# Altium PCB PCB2.PcbDoc
Units mil, origin at the board's own origin, x right, y up, seen from the top; angles counter-clockwise.
Board outline 5995 x 3035 mil, 2 copper layers (Top Layer, Bottom Layer); 109 components, 60 nets, 338 pads, 102 vias.
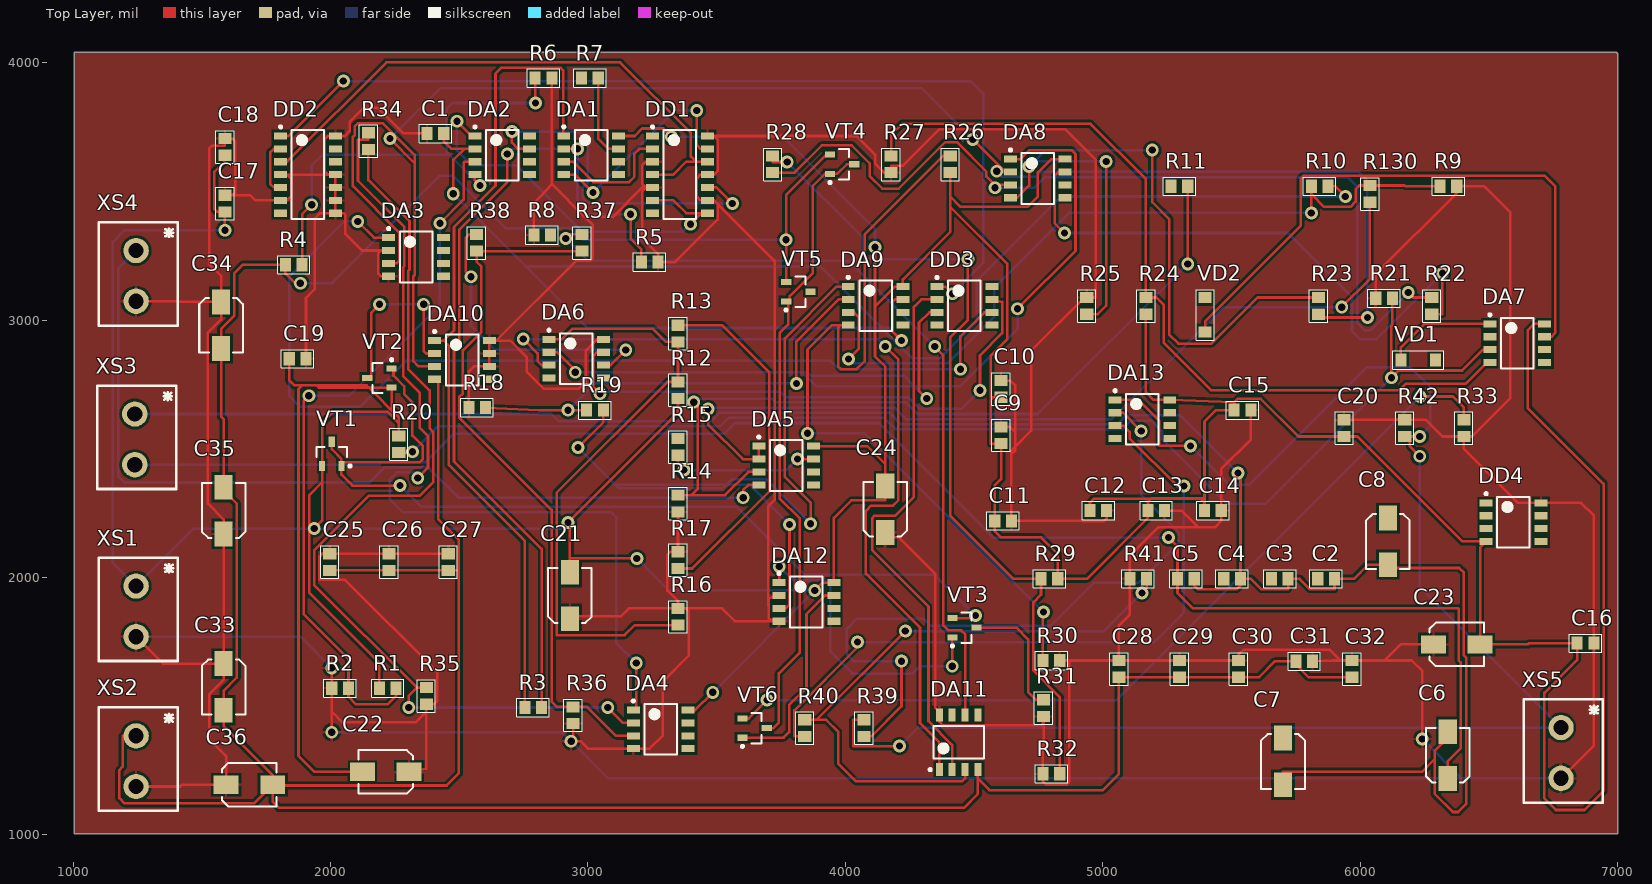
[diagram p0: Top Layer view]
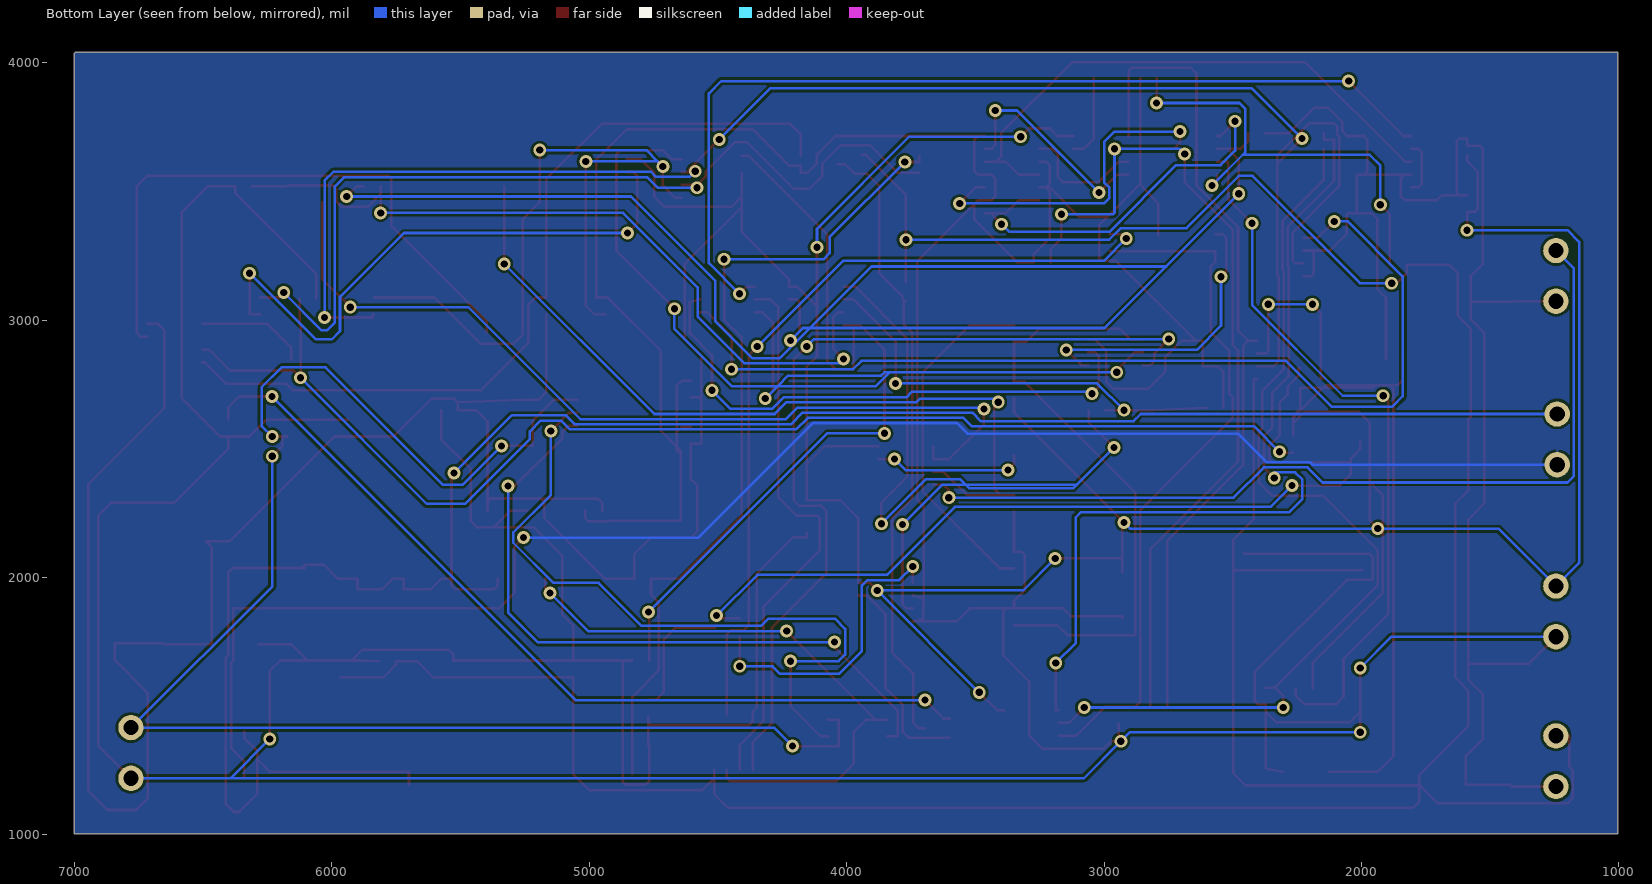
[diagram p1: Bottom Layer view, seen from below]
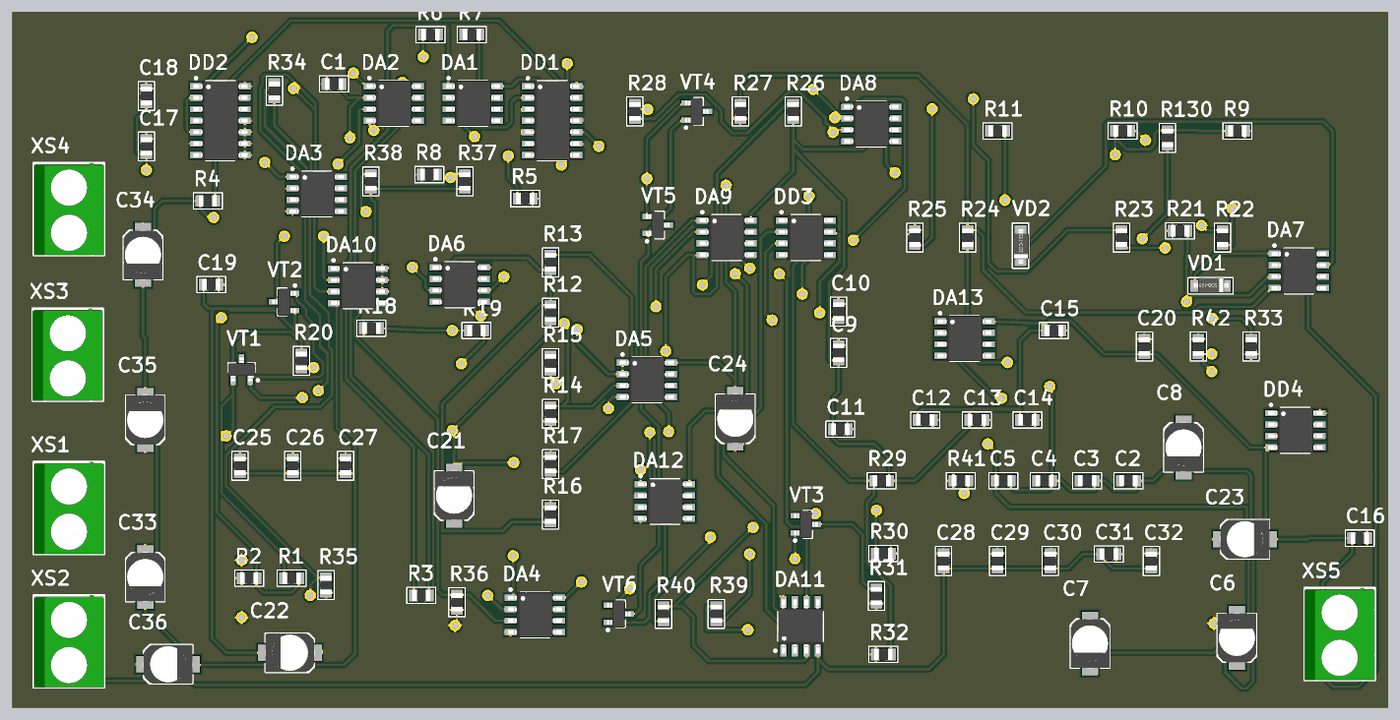
[diagram p2: 3D render of the assembled board from above, using the file's embedded part models]

## Layer stack, top to bottom
Top Solder: solder mask 0.4, Solder Resist, Dk 3.5
Top Layer: signal copper 1.4
Dielectric 1: dielectric 12.6, FR-4, Dk 4.8
Bottom Layer: signal copper 1.4
Bottom Solder: solder mask 0.4, Solder Resist, Dk 3.5

## Board outline
1005,1005 7000,1005 7000,4035 6995,4040 1005,4040

## Design rules (kind name [scope] priority, off if disabled: settings)
Clearance [All] p1: gap=10 ignorepadtopadclearanceinfootprint=FALSE except(0: Arc-Hole Track-Hole SMDPad-Hole THPad-Hole Via-Hole Fill-Hole Poly-Hole Region-Hole Text-Hole)
PolygonConnect [All] p1: connectstyle=Relief reliefconductorwidth=10 reliefentries=4 polygonreliefangle="90 Angle" airgapwidth=10
RoutingVias [All] p1: holewidth=28 width=50 viastyle="Through Hole" minholewidth=28 minwidth=50 maxholewidth=28 maxwidth=50
SolderMaskExpansion [All] p1: expansion=4 istentingtop=FALSE
Width [All] p1: maxlimit=10 minlimit=10 preferedwidth=10
30 further rules are at their usual default settings.

## Components (designator, comment, footprint, x,y, rotation, side; value= is the part's Value field where it differs from the comment)
C1 "39n" 0805 2407.5,3725 r0 top
C2 "39n" 0805 5867.5,1995 r180 top
C3 "39n" 0805 5687.5,1995 r180 top
C4 "39n" 0805 5502.5,1995 r180 top
C5 "39n" 0805 5322.5,1995 r180 top
C6 "1000" "ECAP SMD, 1 мкФ, 50В, Конденсатор электролитический алюминиевый SMD" 6340,1310 r90 top
C7 "1000" "ECAP SMD, 1 мкФ, 50В, Конденсатор электролитический алюминиевый SMD" 5700,1285.55 r270 top
C8 "1000" "ECAP SMD, 1 мкФ, 50В, Конденсатор электролитический алюминиевый SMD" 6107.5,2140 r270 top
C9 "39n" 0805 4605,2552.5 r90 top
C10 "39n" 0805 4605,2732.5 r90 top
C11 "39n" 0805 4612.52,2220 r0 top
C12 "39n" 0805 4982.5,2260 r0 top
C13 "39n" 0805 5207.5,2260 r0 top
C14 "39n" 0805 5427.5,2260 r0 top
C15 "39n" 0805 5542.52,2650 r0 top
C16 "39n" 0805 6875,1745 r0 top
C17 "39n" 0805 1590,3452.5 r90 top
C18 "39n" 0805 1590,3672.5 r90 top
C19 "39n" 0805 1872.52,2850 r0 top
C20 "39n" 0805 5937.5,2580 r90 top
C21 "1000" "ECAP SMD, 1 мкФ, 50В, Конденсатор электролитический алюминиевый SMD" 2930,1930 r90 top
C22 "1000" "ECAP SMD, 1 мкФ, 50В, Конденсатор электролитический алюминиевый SMD" 2215,1245 r180 top
C23 "1000" "ECAP SMD, 1 мкФ, 50В, Конденсатор электролитический алюминиевый SMD" 6375,1740 r0 top
C24 "1000" "ECAP SMD, 1 мкФ, 50В, Конденсатор электролитический алюминиевый SMD" 4155,2265 r90 top
C25 "39n" 0805 1997.5,2060 r90 top
C26 "39n" 0805 2227.5,2060 r90 top
C27 "39n" 0805 2457.5,2060 r90 top
C28 "39n" 0805 5062.5,1645 r90 top
C29 "39n" 0805 5297.5,1645 r90 top
C30 "39n" 0805 5527.5,1645 r90 top
C31 "39n" 0805 5782.5,1675 r0 top
C32 "39n" 0805 5967.5,1645 r90 top
C33 "1000" "ECAP SMD, 1 мкФ, 50В, Конденсатор электролитический алюминиевый SMD" 1585,1575 r270 top
C34 "1000" "ECAP SMD, 1 мкФ, 50В, Конденсатор электролитический алюминиевый SMD" 1575,2980 r270 top
C35 "1000" "ECAP SMD, 1 мкФ, 50В, Конденсатор электролитический алюминиевый SMD" 1585,2260 r90 top
C36 "1000" "ECAP SMD, 1 мкФ, 50В, Конденсатор электролитический алюминиевый SMD" 1685,1195 r0 top
DA1 "КФ140УД18" SOIC-8 3012.5,3640 r0 top
DA2 "КФ140УД18" SOIC-8 2667.5,3640 r0 top
DA3 "КФ140УД18" SOIC-8 2332.5,3245 r0 top
DA4 "КФ140УД18" SOIC-8 3282.5,1410 r0 top
DA5 "КФ140УД18" SOIC-8 3770,2435 r0 top
DA6 "КФ140УД18" SOIC-8 2955,2850 r0 top
DA7 "КФ140УД18" SOIC-8 6610,2910 r0 top
DA8 "КФ140УД18" SOIC-8 4747.5,3550 r0 top
DA9 "КФ140УД18" SOIC-8 4117.5,3055 r0 top
DA10 "КФ140УД18" SOIC-8 2511.3,2845 r0 top
DA11 "КФ140УД18" SOIC-8 4440,1360 r90 top
DA12 "КФ140УД18" SOIC-8 3848.7,1905 r0 top
DA13 "КФ140УД18" SOIC-8 5153.7,2615 r0 top
DD1 "CD43013B" "SOIC 14" 3357.5,3565 r0 top
DD2 "CD43013B" "SOIC 14" 1912.5,3565 r0 top
DD3 "CD43013B" SOIC-8 4462.5,3055 r0 top
DD4 "CD43013B" SOIC-8 6595,2215 r0 top
R1 "13k" 0805 2222.5,1570 r0 top
R2 "0,91k" 0805 2037.5,1570 r0 top
R3 "13k" 0805 2787.5,1495 r0 top
R4 "13k" 0805 1857.52,3215 r0 top
R5 "0,91k" 0805 3240,3225 r180 top
R6 "0,91k" 0805 2827.5,3940 r180 top
R7 "13k" 0805 3007.5,3940 r180 top
R8 "0,91k" 0805 2822.5,3330 r0 top
R9 "13k" 0805 6342.5,3520 r0 top
R10 "13k" 0805 5842.5,3520 r0 top
R11 "130k" 0805 5297.5,3520 r0 top
R12 "510k" 0805 3350,2727.5 r90 top
R13 "1k" 0805 3350,2947.5 r90 top
R14 "0,91k" 0805 3350,2287.5 r90 top
R15 "1k" 0805 3350,2507.5 r90 top
R16 "2k" 0805 3350,1847.5 r90 top
R17 "1k" 0805 3350,2067.5 r90 top
R18 "13k" 0805 2570,2660 r0 top
R19 "13k" 0805 3027.48,2650 r0 top
R20 "13k" 0805 2265,2517.48 r270 top
R21 "0,91k" 0805 6092.5,3085 r0 top
R22 "100k" 0805 6277.5,3055 r90 top
R23 "100k" 0805 5837.5,3055 r90 top
R24 "130k" 0805 5167.5,3055 r90 top
R25 "100k" 0805 4937.5,3055 r90 top
R26 "130k" 0805 4407.5,3605 r90 top
R27 "0,91k" 0805 4177.5,3605 r90 top
R28 "100k" 0805 3717.5,3605 r90 top
R29 "3k" 0805 4792.52,1995 r180 top
R30 "0,91k" 0805 4800,1677.5 r180 top
R31 "13k" 0805 4770,1492.5 r90 top
R32 "2k" 0805 4800,1237.5 r180 top
R33 "13k" 0805 6402.5,2580 r90 top
R34 "1k" 0805 2147.5,3695 r90 top
R35 "0,91k" 0805 2372.5,1540 r90 top
R36 "0,91k" 0805 2942.5,1465 r90 top
R37 "1k" 0805 2977.5,3300 r90 top
R38 "1k" 0805 2567.5,3300 r90 top
R39 "13k" 0805 4072.5,1415 r90 top
R40 "13k" 0805 3842.5,1415 r90 top
R41 "13k" 0805 5137.5,1995 r180 top
R42 "13k" 0805 6172.5,2580 r90 top
R130 "1k" 0805 6037.5,3490 r90 top
VD1 "Диод" SOD-123 6225,2845 r180 top
VD2 "Диод" SOD-123 5397.5,3020 r90 top
VT1 "PNP" SOT23 2005,2480 r90 top
VT2 "PNP" SOT23 2190,2775 r180 top
VT3 "NPN" SOT23 4462.76,1805 r0 top
VT4 "NPN" SOT23 3987.5,3605 r0 top
VT5 "NPN" SOT23 3817.5,3110 r0 top
VT6 "PNP" SOT23 3647.5,1415 r0 top
XS1 "220V 2 pin" DG126-5.0-02P 1245,1770 r0 top
XS2 "220V 2 pin" DG126-5.0-02P 1245,1188.15 r0 top
XS3 "220V 2 pin" DG126-5.0-02P 1240,2438.15 r0 top
XS4 "220V 2 pin" DG126-5.0-02P 1245,3073.15 r0 top
XS5 "220V 2 pin" DG126-5.0-02P 6780,1220 r0 top

## Footprints (in the part's own frame and the unit in brackets; to place one, negate y for a bottom-side part, rotate by r counter-clockwise, add the part's x,y. Pads: shape width x height; smd on the part's side, far side on the other; paste and mask are expansions set on the pad)
0805 [mm] "Чип (SMD)"
  rect 1.1x1.3 smd: 1(-0.825,0) 2(0.825,0)
  silkscreen extent -1.6,-0.9 1.6,0.9, body extent -1,-0.63 1,0.63, height 0.5
DG126-5.0-02P [mm]
  round 2.5 hole 1.5: 1(0,5) 2(0,0)
  silkscreen extent -3.7,-2.4 4.1,7.8, body extent -3.7,-2.42 4.1,7.82, height 9.95
"ECAP SMD, 1 мкФ, 50В, Конденсатор электролитический алюминиевый SMD" [mm] "ECAP SMD, 1 мкФ, 50В, Конденсатор электролитический алюминиевый SMD"
  rect 2.45x1.8 smd: 1(-2.3,0) 2(2.3,0)
  silkscreen extent -2.7,-2.15 2.7,2.15, body extent -2.75,-2.15 2.75,2.15, height 5.4
SOD-123 [mm] "(SMD)"
  rect 1.1x1.3 smd: 1(-1.7,0) 2(1.7,0)
  silkscreen extent -2.5,-0.9 2.5,0.9, body extent -2,-0.9 1.85,0.8, height 1.37
"SOIC 14" [mm] "SOIC, 14-Leads, Body 8,65x3,90mm, Pitch 1,27mm, IPC Medium Density"
  rect 1.28x0.7 smd: 1(-2.7,3.81) 2(-2.7,2.54) 3(-2.7,1.27) 4(-2.7,0) 5(-2.7,-1.27) 6(-2.7,-2.54) 7(-2.7,-3.81) 8(2.7,-3.81) 9(2.7,-2.54) 10(2.7,-1.27) 11(2.7,0) 12(2.7,1.27) 13(2.7,2.54) 14(2.7,3.81)
  silkscreen extent -2.82,-4.4 1.6,4.83, body extent -3,-4.4 3,4.4, height 1.75
SOIC-8 [mm] "SOIC, 8-Leads, Body 4,90x3,90mm, Pitch 1,27mm, IPC Medium Density"
  rect 1.28x0.7 smd: 1(-2.7,1.905) 2(-2.7,0.635) 3(-2.7,-0.635) 4(-2.7,-1.905) 5(2.7,-1.905) 6(2.7,-0.635) 7(2.7,0.635) 8(2.7,1.905)
  silkscreen extent -2.82,-2.5 1.6,2.93, body extent -3,-2.5 3,2.5, height 1.75
SOT23 [mm] "SOT23, 3-Leads, Body 2,92x2,45mm, Pitch 0,95mm, IPC Medium Density"
  rect 1x0.6 smd: 1(-1.2,-0.95) 2(-1.2,0.95) 3(1.2,0)
  silkscreen extent -1.32,-1.92 0.7,1.5, body extent -1.3,-1.52 1.3,1.52, height 1.12

## Part data
C1 C2 C3 C4 C5 C9 C10 C11 C12 C13 C14 C15 C16 C17 C18 C19 C20 C25 C26 C27 C28 C29 C30 C31 C32: library part "К53-68\"R\"-25В-0.039 мкФ ±10% 0805", "К53-68\"R\"-25В-0.039 мкФ ±10%"
C6 C7 C8 C21 C22 C23 C24 C33 C34 C35 C36: library part "SMD Конденсатор полярный", "К53-68\"R\"-25В-1000 пФ ±10%"
DA1 DA4 DA5 DA7 DA8 DA9 DA12: library part ОУ
DA2 DA3: library part Компаратор
DA6 DA10 DA11: library part Ключ
DA13: library part "ОУ Силовой"
DD3 DD4: library part Ивертор
R1 R3 R4 R7 R11 R20: library part "0.125Вт 0805 13 кОм, 5%, Чип резистор (SMD)", "0805-0.125 Вт -13 кОм±5%"
R2 R5 R6 R8 R14 R21 R27 R30 R35 R36: library part "0.125Вт 0805 0,91 кОм, 5%, Чип резистор (SMD)", "0805-0.125 Вт -0,91 кОм±5%"
R9 R10 R15 R18 R19 R31 R33 R39 R40 R41 R42 R130: library part "0.125Вт 0805 1 кОм, 5%, Чип резистор (SMD)", "0805-0.125 Вт -1 кОм±5%"
R12 R13 R16 R17 R22 R23 R25 R28 R29 R32 R34 R37 R38: library part "0.125Вт 0805 0,51 кОм, 5%, Чип резистор (SMD)", "0805-0.125 Вт -3 кОм±5%"
R24 R26: library part "0.125Вт 0805 130 кОм, 5%, Чип резистор (SMD)", "0805-0.125 Вт -130 кОм±5%"
VD1 VD2: "MMSZ5235B"
VT1 VT2 VT3 VT4 VT5 VT6: "SI2304DDS-T1-GE3"
XS1 XS2 XS3 XS4 XS5: "DG126-5.0-0.2P"

## Via types
v1: diameter 50, hole 28, Top Layer to Bottom Layer, 102 vias

## Nets (pads, with @x,y where several pads share a name; then routed paths per layer and width w, separated by ;. In a path a pad name is that pad's centre, name@x,y a point inside that pad or via, vN(x,y) a via of type N, cw(c..) or ccw(c..) an arc to the next point about the centre after c; other vN are vias at no path point)
+5V: C2.1 C3.1 C4.1 C5.1 C6.2 C7.2 C8.2 XS3.1 | length 8108.3
  Top Layer w10: C5.1 5354.98,1969.02 5370,1954 5520,1954 5534.98,1968.98 C4.1 ; v1(5525,2406) 5534.98,2396.02 C4.1 ; C7.2 5700,1245 6240,1245 6289,1294 ; C6.2 6340,1377 6289,1326 6289,1294 ; C4.1 5575,1995 5616,1954 5719.98,1954 C3.1 5764,1995 5805,1954 5899.98,1954 C2.1 5976,1995 6030.45,2049.45 C8.2 6107.5,2037 6384,2037 6402.32,2018.68 6402.32,1697.68 6411,1689 6411,1120 6380,1089 6360,1089 6289,1160 6289,1294
  Bottom Layer w10: XS3.1 2857.55,2635 2885,2607.55 3479.55,2607.55 3512,2640 4171,2640 4216,2595 5054.73,2595 5089.21,2629.47 5301.53,2629.47 v1(5525,2406)
+15V: C9.1 C10.1 C11.1 C12.1 C13.1 C14.1 C15.1 C16.1 C17.1 C18.1 C19.1 C20.1 C21.2 C22.2 C23.2 C24.2 DA1.8 DA4.8 DA5.8 DA7.8 DA8.8 DA9.8 DA12.8 DA13.8 DD4.4 R1.1 R12.1 R20.1 R24.1 R26.1 R29.1 VT1.2 VT2.2 XS1.1 | length 24504.4
  Top Layer w10: v1(1590,3349) C17.1 1560,3420.02 1549,3431.02 1549,3576 1590,3617 C18.1 ; C19.1 1840.04,2765.96 1860,2746 1890,2746 ; v1(1937,2190) 1967.6,2220.6 1967.6,2370 ; C22.2 1938,1245 1876,1307 1876,2732 1890,2746 ; R1.1 2190.02,1667.98 1916.91,1941.09 1916.91,2319.31 1967.6,2370 ; R20.1 2265,2600 ; v1(2923,2214) v1@2930,2221 ; C21.2 2930,2074 ; DA1.8 3182,3715 3211,3744 3292,3744 v1(3324,3712) ; v1(3190,2074) 2930,2074 ; R12.1 3350,2641 v1@2930,2221 ; DA4.8 3416,1485 v1(3485,1554) ; DA5.8 4085,2510 4155,2440 ; v1(3881,1950) 3911,1980 DA12.8 3955,2231 4024,2300 4155,2300 C24.2 4155,2440 ; v1(4115,3283) 4115,3052 ; DA9.8 DA9.8@4223,3130 ; R26.1 4407.5,3480 ; C10.1 4574.02,2700.02 ; DA8.8 4800,3625 4748,3573 4748,3480 4708,3440 4447.5,3440 4407.5,3480 ; C12.1 4950.02,2290 4966.02,2306 5188,2306 ; R24.1 5167.5,2720 5197.5,2690 DA13.8 5510.04,2680 ; C14.1 5395.02,2290.98 ; DA7.8 6675,2985 6650,2960 6650,2659 6945,2364 6945,1171 6871,1097 6760,1097 6715,1142 6715,1552 6842.52,1679.52 C16.1 6656,1745 6651,1740 C23.2 6465.55,2116.85 DD4.4 6396.52,2140 5989,2547.52 C20.1 5760,2547.52 5613.52,2694 5524.04,2694 5510.04,2680 ; 1890,2746 1946.4,2746 ; 1946.4,2746 2141,2746 2149.4,2737.6 ; 1946.4,2746 1954.8,2737.6 2149.4,2737.6 ; 1967.6,2370 VT1.2 1967.6,2600 2011.6,2644 2221,2644 2265,2600 ; 2149.4,2737.6 2265,2622 ; 2149.4,2737.6 VT2.2 2237.24,2656.76 2265,2629 2265,2622 ; 2265,2600 2265,2622 ; 2930,2074 v1@2930,2221 ; 4115,3052 4115,2859 4155,2819 4155,2440 ; 4115,3052 4193,3130 DA9.8@4223,3130 ; DA9.8@4223,3130 4223,3158 4407.5,3342.5 4407.5,3440 ; 4407.5,3440 4407.5,3480 ; 4407.5,3440 4629,3218.5 4629,2926 4564,2861 4564,2700.02 4574.02,2700.02 ; 4574.02,2700.02 4564,2690 4564,2520.02 C9.1 4605,2381.96 4580.04,2357 C11.1 4580.04,2180 4604.04,2156 4760,2156 4825,2091 R29.1 4938.02,1995 5175.02,2232 C13.1 5175.02,2293.02 5188,2306 ; 5188,2306 5190,2308 5395.02,2308 ; 5188,2306 5380,2306 5395.02,2290.98 ; 5395.02,2290.98 5395.02,2308 ; 5395.02,2308 5395.02,2605.02 5440,2650 C15.1 5510.04,2680
  Bottom Layer w10: v1(1590,3349) 1200,3349 1155,3304 1155,2056.85 XS1.1 1468.15,2190 v1(1937,2190) 2899,2190 v1(2923,2214) ; v1(3190,2074) 3314,1950 v1(3881,1950) v1(3485,1554) ; v1(3324,3712) 3757.01,3712 4115,3354.01 v1(4115,3283)
-15V: C25.1 C26.1 C27.1 C28.1 C29.1 C30.1 C31.1 C32.1 C33.2 C34.2 C35.2 C36.2 DA10.4 DA11.4 R4.1 VT4.2 VT5.2 XS2.1 | length 13811
  Top Layer w10: XS2.1 1193,1385 1193,1265 1180,1252 1180,1143 1200,1123 1703.55,1123 C36.2@1774.05,1193.5 ; v1(1883,3143) 1862.04,3143 1825.04,3180 R4.1 1660,3215 1626,3181 1626,3016 1575,2965 C34.2 1575,2625 1585,2615 C35.2 1585,2338 1636,2287 1636,1611 1585,1560 C33.2 1585,1423 1775.55,1232.45 C36.2 ; C25.1 C26.1 C27.1 2499,2027.52 ; DA10.4 2419,2770 2419,2226 2499,2146 2499,2027.52 ; VT5.2 3770,3147.4 v1(3770,3312) 3770,3485.4 3927,3642.4 VT4.2 ; DA11.4 4515,1219 ; C32.1 5799.48,1612.52 5750.02,1661.98 C31.1 5669.48,1675 5607,1612.52 C30.1 C29.1 C28.1 5062.5,1236.5 5000,1174 4560,1174 4515,1219 ; C36.2@1774.05,1193.5 C36.2@1775.55,1192 ; C36.2@1774.05,1193.5 C36.2 ; C36.2@1775.55,1192 2451,1192 2499,1240 2499,2027.52 ; C36.2@1775.55,1192 C36.2 ; C36.2@1775.55,1192 1775.55,1129.45 1800,1105 4460,1105 4515,1160 4515,1219
  Bottom Layer w10: v1(1883,3143) 2006,3143 2423,3560 2477,3560 2680,3357 2935,3357 2980,3312 v1(3770,3312)
A: C1.1 C9.2 C10.2 C11.2 C12.2 C13.2 C14.2 C15.2 C16.2 C17.2 C18.2 C19.2 C20.2 C21.1 C22.1 C23.1 C24.1 C25.2 C26.2 C27.2 C28.2 C29.2 C30.2 C31.2 C32.2 C33.1 C34.1 C35.1 C36.1 DA3.2 DA3.4 DA4.4 DA6.8 DA10.6 DA10.7 DA10.8 DA11.8 DA12.2 DA12.4 DD1.3 DD1.5 DD1.9 DD1.11 DD1.14 DD2.4 DD2.6 DD2.8 DD2.9 DD2.10 DD2.11 DD2.14 DD4.8 R2.1 R5.1 R6.1 R8.1 R9.2 R14.1 R16.2 R17.2 R18.1 R21.1 R25.2 R27.1 R30.1 R31.1 R32.2 R33.1 R35.1 R36.1 R41.2 R42.2 XS1.2 XS2.2 XS4.2 XS5.2 | length 36655.4
  Top Layer w10: XS2.2 1416,1188.15 1422.85,1195 C36.1 1594.45,1306.55 1530,1371 1530,1547 1585,1602 C33.1 ; XS1.2 1349.45,1665.55 C33.1 ; XS4.2 1408,3073.15 1410.6,3070.55 C34.1 ; C17.2 1620,3484.98 ; DD2.4 1832,3565 ; C19.2 1905,3085.81 1939,3119.81 1939,3394 1960,3415 DD2.8 ; v1(2005.02,1399) 2005.02,1480 ; v1(2005.02,1648.98) R2.1 2005.02,1480 ; DA3.4 2196,3170 2186,3180 2186,3260 2196,3270 ; DA3.2 2196,3270 ; C22.1 2372.5,1257.5 2372.5,1480 ; C1.1 2283,3725 2184,3824 2128.83,3824 2074.83,3770 2074.83,3733.83 2056,3715 DD2.14 1990,3715 1978,3703 1978,3577 1990,3565 ; C27.2 C26.2 C25.2 1969.39,2092.48 1956.91,2080 1956.91,1990.86 2057.14,1990.86 2414,1634 2414,1520 2401.52,1507.52 R35.1 2372.5,1480 ; R18.1 2537.52,2800 2557.52,2820 DA10.6 DA10.7 DA10.8 2644.02,2920 ; R8.1 2790.02,3453 2859.98,3528.14 ; R6.1 2859.98,3528.14 ; C21.1 2930,1849.42 3128.97,1849.42 3159.53,1879.98 R16.2 ; v1(2935,1364) v1@2942.5,1371.5 ; R36.1 v1@2942.5,1371.5 ; DA6.8 3036,2925 2991,2880 2991,2760 2964,2733 2829,2733 2762,2800 2762,2856.3 2698.3,2920 2644.02,2920 ; DD1.5 3226,3515 ; DD1.3 3226,3615 3211,3600 3211,3530 3226,3515 ; R14.1 R17.2 3320,2099.98 3309,2088.98 3309,1949 3350,1908 R16.2 ; DD1.14 3490,3715 ; DA12.2 3702,1920 3702,1840 ; C24.1 4155,2156 4208,2156 4349,2015 4349,1494 4365,1478 DA11.8 4365,1440 4379,1426 4760,1426 4770,1436 ; C9.2 4640,2584.98 4660,2564.98 ; C10.2 4640,2764.98 4660,2744.98 4660,2564.98 ; R31.1 4770,1436 ; R30.1 4860,1677.5 ; C12.2 5014.98,2230 5003.96,2218.98 4924,2218.98 4922.98,2220 C11.2 4645,2479 ; C13.2 5306,2260 5371,2195 ; C15.2 5575,2536 5459.98,2420.98 C14.2 5459.98,2220 5434.98,2195 5371,2195 ; C31.2 5892.48,1677.48 5923.52,1677.48 ; C20.2 R42.2 6255,2612.48 6319.96,2547.52 R33.1 ; R21.1 6060.02,3178 6374.98,3492.96 R9.2 6480,3520 6583,3417 6583,2697 6433.52,2547.52 R33.1 ; v1(6241,1373) 6241,1636.48 6200,1677.48 6094,1677.48 ; C23.1 6156.52,1740 6094,1677.48 ; XS5.2 6907.48,1347.48 C16.2 6907.48,2240 6857.48,2290 DD4.8 6612,2290 6402.5,2499.5 R33.1 ; C34.1 1575,3002 1524,2951 1524,2287 1585,2226 C35.1 C33.1 ; C34.1 1575,3172 1529,3218 1529,3666 1540,3677 1590,3677 C18.2 1620,3704.98 1631,3693.98 1631,3495.98 1620,3484.98 ; 1620,3484.98 1688,3484.98 1707.98,3465 DD2.6 1832,3465 1847,3480 1847,3550 1832,3565 ; 1832,3565 1990,3565 ; 1990,3565 DD2.11 DD2.10 DD2.9 DD2.8 ; 2005.02,1480 2047.52,1437.5 2330,1437.5 2372.5,1480 ; DD2.8 2051,3415 2058.11,3407.89 2058.11,3334.91 2123.02,3270 2196,3270 ; 2644.02,2920 2954.02,3230 3009,3230 3019,3240 3019,3369.12 2987.12,3401 ; 2859.98,3528.14 2987.12,3401 ; v1@2942.5,1371.5 2942.5,1364 2971,1364 3000,1335 DA4.4 3240,1335 3291,1386 3291,1596 3391,1696 3391,1868.98 3380,1879.98 ; 2987.12,3401 3097,3401 3211,3515 3226,3515 ; 3226,3515 3211,3500 3211,3318 3272.48,3256.52 R5.1 3339,3225 3504,3390 3504,3451 ; R16.2 3380,1879.98 ; 3380,1879.98 3521,1879.98 3570.98,1830 3712,1830 ; 3490,3715 4043,3715 4116.2,3641.8 4116.2,3606.8 4150.48,3572.52 R27.1 4177.5,3600 4224,3600 4365.29,3741.29 4852.7,3741.29 4973,3620.99 4973,3087.48 R25.2 4928.48,3087.48 4722,2881 4722,2571 4660,2509 ; 3490,3715 3504,3701 3504,3579 3490,3565 DD1.11 3438,3565 3423,3550 3423,3480 3438,3465 DD1.9 3490,3465 3504,3451 ; 3504,3451 3725,3230 3725,2301 3700,2276 3700,1930 3702,1840 ; 3702,1840 3712,1830 ; 3702,1840 DA12.4 3712,1830 ; 4645,2479 4645,2494 4660,2509 ; 4645,2479 4660,2494 4660,2509 ; 4660,2509 4660,2564.98 ; 4770,1436 4770,1349.48 4767.52,1347 R32.2 4767.52,1208.48 4780,1196 4860,1196 4870,1206 4870,1667.5 4860,1677.5 ; 4860,1677.5 4947,1677.5 C28.2 ; C28.2 5062.5,1814 5105.02,1856.52 R41.2 5105.02,2085.02 5215,2195 5371,2195 ; C28.2 C29.2 C30.2 5527.5,1700 5547.5,1720 5881,1720 5923.52,1677.48 ; 5923.52,1677.48 C32.2 6094,1677.48
  Bottom Layer w10: XS1.2 1884,1770 v1(2005.02,1648.98) ; v1(2005.02,1399) 2900,1399 v1(2935,1364) 3079,1220 6394,1220 ; v1(6241,1373) 6394,1220 ; XS5.2 6394,1220
D: C5.2 C6.1 XS3.2 | length 6297.5
  Top Layer w10: v1(5255,2155) 5290.02,2119.98 C5.2 5290.02,1940.02 5349.04,1881 6380,1881 6382.32,1878.68 6382.32,1678.24 6391,1669.57 6391,1338 6340,1287 C6.1
  Bottom Layer w10: XS3.2 2191.12,2438.15 2201.04,2448.07 2368.67,2448.07 2479.73,2559.14 3531.14,2559.14 3572,2600 4131,2600 4576,2155 v1(5255,2155)
NetC1_2: C1.2 DA2.2 DA9.7 R10.2 | length 6707.6
  Top Layer w10: C1.2 2439.98,3695.38 2470.36,3665 2520,3665 ; v1(2477,3490) v1(2477,3491) 2477,3622 2520,3665 ; DA2.2 2520,3665 ; v1(4218.35,2921) 4183,2956.35 4183,3070 4193,3080 DA9.7 ; R10.2 5902,3520 v1(5942,3480)
  Bottom Layer w10: v1(2477,3490) 2759,3208 2760,3208 ; v1(2477,3491) 2760,3208 ; v1(4218.35,2921) 4170.38,2968.97 4142.03,2968.97 ; v1(5942,3480) 4838,3480 4511,3153 4511,2995.73 4367,2851.73 4259.27,2851.73 4142.03,2968.97 ; 2760,3208 2999.03,2968.97 4142.03,2968.97 ; 2760,3208 3903,3208 4142.03,2968.97
NetDA1_1: DA1.1 DA10.1 R3.1 | length 3245.1
  Top Layer w10: DA10.1 2440,2920 ; R3.1 2755.02,2141.91 2460,2436.93 2460,2900 2440,2920 ; DA1.1 2904,3715 2904,3970 2893.41,3980.59 2664.59,3980.59 2641,3957 2641,3522 2480,3361 2480,2960 2440,2920
NetDA1_2: DA1.2 R3.2 R5.2 | length 3372.2
  Top Layer w10: v1(2687,3645) 2687,3537 2500,3350 2500,2902 2480,2882 2480,2450.61 2819.98,2110.63 R3.2 ; DA1.2 v1(2960,3665) ; v1(3166,3411) 3166,3316 3207.52,3274.48 R5.2
  Bottom Layer w10: v1(2687,3645) 2707,3665 v1(2960,3665) 2959.69,3664.69 2959.69,3416.31 2965,3411 v1(3166,3411)
NetDA1_3: DA1.3 DD1.2 | length 483.3
  Top Layer w10: DA1.3 2942,3615 3021,3536 3160,3536 3180,3556 3180,3645 3200,3665 DD1.2
NetDA1_4: DA1.4 DD1.13 | length 858.7
  Top Layer w10: DA1.4 2950,3565 v1(3019.69,3495.31) ; v1(3423,3814) 3423,3680 3438,3665 DD1.13
  Bottom Layer w10: v1(3019.69,3495.31) 3338.38,3814 v1(3423,3814)
NetDA1_7: DA1.7 R7.1 | length 330.4
  Top Layer w10: R7.1 3039.98,3705.02 3080,3665 DA1.7
NetDA2_1: DA2.1 DD1.6 DD1.8 | length 1552
  Top Layer w10: v1(2491,3772) 2548,3715 DA2.1 ; DD1.6 3332,3465 3382,3415 DD1.8@3441,3415 ; v1(3398,3372) DD1.8@3441,3415 ; DD1.8 DD1.8@3441,3415
  Bottom Layer w10: v1(2491,3772) 2491,3658 2547.53,3601.47 2720.53,3601.47 2979.7,3342.3 3368.3,3342.3 v1(3398,3372)
NetDA2_3: DA2.3 R1.2 R2.2 | length 2781.5
  Top Layer w10: v1(1916,2706) 1896.91,2686.91 1896.91,1856.96 2069.98,1683.89 R2.2 2069.98,1536.98 2100,1506.96 2221.94,1506.96 2254.98,1540 R1.2 ; v1(2425,3376) 2517,3468 2517,3611 2521,3615 DA2.3
  Bottom Layer w10: v1(1916,2706) 2073,2706 2425,3058 v1(2425,3376)
NetDA2_4: DA2.4 R4.2 R6.2 | length 1804.9
  Top Layer w10: R4.2 1890,3411 v1(1927,3448) ; DA2.4 2561,3565 2561,3542.39 v1(2580.39,3523) ; R6.2 2795.02,3843.98 v1(2796,3843)
  Bottom Layer w10: v1(1927,3448) 1927,3600 1969,3642 2461.39,3642 ; v1(2580.39,3523) 2461.39,3642 ; v1(2796,3843) 2474,3843 2451,3820 2451,3652.39 2461.39,3642
NetDA2_7: DA2.7 DD1.10 | length 1373
  Top Layer w10: v1(2705,3732) 2705,3689 2729,3665 DA2.7 ; DD1.10 3499,3515 v1(3561,3453)
  Bottom Layer w10: v1(2705,3732) 2960,3732 3000,3692 3000,3535 2979.69,3514.69 2979.69,3473.31 3000,3453 v1(3561,3453)
NetDA3_1: DA3.1 DD3.6 | length 3965.3
  Top Layer w10: v1(2106,3383) 2169,3320 DA3.1 ; v1(4447,2808.88) 4447,2937 4540,3030 DD3.6
  Bottom Layer w10: v1(2106,3383) 2053.19,3383 1840,3169.81 1840,2704 1880,2664 2116,2664 2293.33,2841.33 3942.41,2841.33 3974.85,2808.88 v1(4447,2808.88)
NetDA3_3: DA3.3 DA8.2 DA10.3 R23.1 | length 6827.1
  Top Layer w10: DA3.3 2257,3220 2267,3230 2267,3340 2086.91,3520.09 2086.91,3711.08 2095,3719.18 2095,3753.14 2106,3764.14 2203.86,3764.14 2327,3641 2327,3609 ; v1(2231,3705) 2327,3609 ; DA10.3 2342,2820 2322,2840 2322,3170 2327,3175 2327,3609 ; v1(4495,3701) 4612,3584 v1@4612,3575 ; v1(4588,3578) 4604,3578 4607,3575 v1@4612,3575 ; DA8.2 v1@4612,3575 ; R23.1 5841,3022.52 5841,3010 v1(6028,3010)
  Bottom Layer w10: v1(2231,3705) 2427,3901 4295,3901 v1(4495,3701) ; v1(4588,3578) 4610,3556 4740,3556 4760,3576 5994,3576 6028,3542 v1(6028,3010)
NetDA4_1: DA4.1 R34.2 | length 3433.7
  Top Layer w10: R34.2 2147.5,3700 2106.91,3700 2106.91,3541.09 2287,3361 2287,3210 2282,3205 2282,2782 2346,2718 2346,2582 2379,2549 2379,2427 v1(2339,2387) ; DA4.1 3188,1485 v1(3188,1668)
  Bottom Layer w10: v1(2339,2387) 2339,2407 2337.93,2408.07 2258.07,2408.07 2230,2380 2230,2304 2280,2254 3090,2254 3110,2234 3110,1746 v1(3188,1668)
NetDA4_2: DA4.2 R34.1 R35.2 | length 3695.9
  Top Layer w10: R34.1 2147.5,3544 2307,3384.5 2307,3195 2302,3190 2302,2809.11 2384.89,2726.22 2384.89,2580 2399,2565.89 2399,2369.83 2346.17,2317 2148.21,2317 1936.91,2105.7 1936.91,1970.86 2335.29,1572.48 2336.48,1572.48 ; v1(2304,1495) 2304,1540 2336.48,1572.48 ; R35.2 2336.48,1572.48 ; v1(3077,1495) 3137,1435 DA4.2
  Bottom Layer w10: v1(2304,1495) v1(3077,1495)
NetDA4_3: DA4.3 R36.2 R37.1 R38.1 | length 2723.5
  Top Layer w10: R37.1 R38.1 2567.5,3226.5 2586,3208 2586,2953.07 2514.5,2881.57 2514.5,2715.5 2500,2701 2500,2621.61 2859,2262.61 2859,1518.48 2880,1497.48 R36.2 2997,1497.48 3109.48,1385 DA4.3
NetDA5_1: DA5.1 DA5.2 R130.1 | length 3477.4
  Top Layer w10: v1(3467,2655) 3467,2595 3602,2460 DA5.2 DA5.1 ; v1(5928,3050) 6037.5,3159.5 R130.1
  Bottom Layer w10: v1(3467,2655) 3472,2660 4191,2660 4236,2615 5034.73,2615 5469.73,3050 v1(5928,3050)
NetDA5_3: DA5.3 R11.2 R14.2 | length 3220.9
  Top Layer w10: R14.2 3403,2319.98 ; v1(3411,2681) 3426,2666 3426,2342.98 3403,2319.98 ; DA5.3 3623,2410 3532.98,2319.98 3403,2319.98 ; v1(5329.98,3217.98) R11.2
  Bottom Layer w10: v1(3411,2681) 3425,2695 3714.94,2695 3729.94,2680 4235,2680 4280,2635 4747,2635 v1(5329.98,3217.98)
NetDA5_7: DA5.7 R15.1 | length 588.7
  Top Layer w10: R15.1 3350,2440 v1(3373,2417) ; v1(3814,2460) DA5.7
  Bottom Layer w10: v1(3373,2417) 3771,2417 v1(3814,2460)
NetDA6_1: DA6.1 R12.2 R13.1 R16.1 | length 2385.5
  Top Layer w10: DA6.1 2898,2925 2940,2967 3251,2967 3302.98,2915.02 R13.1 R12.2 3309,2759.98 2879,2329.98 2879,1776 3142.98,1776 3182,1815.02 R16.1
NetDA6_2: DA6.2 DA8.1 DD3.3 | length 3935.5
  Top Layer w10: DA6.2 2880,2875 2951,2804 v1(2951,2797) ; v1(4316,2695) 4286,2725 4286,2990 4326,3030 DD3.3 ; DA8.1 4680,3625 4714,3659 4880,3659 4894,3645 4894,3269 v1(4669,3044)
  Bottom Layer w10: v1(2951,2797) 3833,2797 ; v1(4316,2695) 4267.39,2743.61 ; v1(4669,3044) 4669,2965.61 4447,2743.61 4267.39,2743.61 ; 3833,2797 3853,2797 3866,2784 4227,2784 4267.39,2743.61 ; 3833,2797 3886.39,2743.61 4267.39,2743.61
NetDA6_3: DA6.3 DA11.1 | length 3461.7
  Top Layer w10: v1(2749,2926) 2805,2870 2805,2840 2820,2825 DA6.3 ; v1(4155,2897) 4206,2846 4206,2300 4185,2279 4100,2279 4079.89,2258.89 4079.89,2015.11 4290,1805 4290,1434 4365,1359 DA11.1
  Bottom Layer w10: v1(2749,2926) 4126,2926 v1(4155,2897)
NetDA6_6: DA6.6 R38.2 | length 1147
  Top Layer w10: v1(2546,3168) 2526,3188 2526,3320 2538.48,3332.48 R38.2 ; DA6.6 3088,2825 v1(3147,2884)
  Bottom Layer w10: v1(2546,3168) 2546,2978 2640,2884 v1(3147,2884)
NetDA6_7: DA6.7 DD3.7 | length 2159.9
  Top Layer w10: v1(3047,2714) 3021,2740 3021,2860 3036,2875 DA6.7 ; v1(4523,2727) 4523,2863 4609,2949 4609,3070 DD3.7
  Bottom Layer w10: v1(3047,2714) 3054.57,2721.57 3745.53,2721.57 3767.1,2700 4245,2700 4290,2655 4451,2655 v1(4523,2727)
NetDA6_15: R13.2 R17.1 | length 1371.7
  Top Layer w10: R17.1 3405.02,2035.02 3705,2335 3705,2796.35 3521.37,2979.98 R13.2
NetDA7_1: DA7.1 VD1.2 | length 432.4
  Top Layer w10: VD1.2 6158.07,2894.07 6249,2985 DA7.1
NetDA7_3: DA7.3 R20.2 R21.2 | length 5038
  Top Layer w10: R20.2 2315.74,2485 v1(2319,2488.26) ; R21.2 6124.98,2979.98 6121,2976 v1(6121,2776) 6149,2804 6396,2804 6477,2885 DA7.3
  Bottom Layer w10: v1(2319,2488.26) 2418.28,2587.55 3514.55,2587.55 3547,2620 4151,2620 4196,2575 5074.73,2575 5109.21,2609.47 5189.21,2609.47 5230.69,2567.99 5230.69,2537.75 5482.44,2286 5631,2286 v1(6121,2776)
NetDA7_4: DA7.4 R24.2 R27.2 | length 3254.7
  Top Layer w10: R27.2 4177.5,3720 4219.5,3762 4952.57,3762 5167.5,3547.07 R24.2 5208.52,3087.48 5236,3060 5236,2912 5420,2728 6152,2728 6177,2753 6410,2753 6492,2835 DA7.4
NetDA7_7: DA7.7 VD2.1 | length 2377.3
  Top Layer w10: VD2.1 5397.5,2995 5769,3366.5 5769,3550 5780,3561 6716,3561 6757,3520 6757,2950 6742,2935 DA7.7
NetDA8_3: DA8.3 R22.2 R28.1 | length 3574.1
  Top Layer w10: R28.1 3802.52,3572.52 3909,3679 4024,3679 4094,3609 4094,3560 4144,3510 4207,3510 4388,3691 4433,3691 4548,3576 4548,3557 4581,3524 v1(4581,3514) 4592,3525 DA8.3 ; v1(6186.48,3107.48) 6206.48,3087.48 R22.2
  Bottom Layer w10: v1(4581,3514) 4734,3514 4774,3554 5953,3554 5988,3519 5988,2991 6019,2960 6039,2960 v1(6186.48,3107.48)
NetDA8_4: DA8.4 R23.2 R25.1 | length 3011.5
  Top Layer w10: DA8.4 4667,3475 4714,3522 v1(4714,3596) ; R25.1 4980,3022.52 5013,3055.52 v1(5013,3616) ; v1(5192,3660) 5192,3458 5258,3392 5258,2944 5294,2908 5422,2908 5601.48,3087.48 R23.2
  Bottom Layer w10: v1(4714,3596) 4734,3616 ; v1(5013,3616) 4734,3616 ; v1(5192,3660) 4778,3660 4734,3616
NetDA8_7: DA8.7 R22.1 | length 2309.2
  Top Layer w10: v1(4851,3338) 4813,3376 4813,3560 4828,3575 DA8.7 ; R22.1 6319,3022.52 v1(6319,3182)
  Bottom Layer w10: v1(4851,3338) 5720,3338 5968,3090 5968,2957 6000,2925 6062,2925 v1(6319,3182)
NetDA9_1: DA9.1 DA12.3 R19.2 | length 3429.7
  Top Layer w10: v1(2962,2505) 3059.96,2602.96 R19.2 ; DA12.3 3768,1880 3783,1895 v1(3783,2206) ; v1(3865,2209) 3865,2290.64 3765,2390.64 3765,2929 3966,3130 DA9.1
  Bottom Layer w10: v1(2962,2505) 3107,2360 ; v1(3783,2206) 3629,2360 3537.25,2360 ; v1(3865,2209) 3691.68,2382.32 3559.57,2382.32 3537.25,2360 ; 3107,2360 3537.25,2360 ; 3107,2360 3121,2346 3523.25,2346 3537.25,2360
NetDA9_2: DA9.2 R18.2 R19.1 | length 1754.2
  Top Layer w10: R18.2 2809,2650 v1(2923,2650) R19.1 ; v1(3810,2754) 3810,2916.36 3973.64,3080 DA9.2
  Bottom Layer w10: v1(2923,2650) 3027,2754 v1(3810,2754)
NetDA9_3: DA9.3 R9.1 R10.1 R130.2 | length 3028.9
  Top Layer w10: DA9.3 4034,3030 4051.4,3012.6 4051.4,2888.4 v1(4012,2849) ; v1(5810.02,3416) 5810.02,3490 ; R10.1 5810.02,3490 ; R9.1 6174.48,3520 6172,3522.48 R130.2 5996.48,3522.48 5982,3508 5982,3460 5962,3440 5860.02,3440 5810.02,3490
  Bottom Layer w10: v1(4012,2849) 4029.27,2831.73 4397,2831.73 4579,3013.73 4579,3127 4868,3416 v1(5810.02,3416)
NetDA9_4: DA9.4 R26.2 R30.2 | length 3152.4
  Top Layer w10: v1(3853,2560) 3853,2885.06 3947.94,2980 3982,2980 ; DA9.4 3982,2980 ; R26.2 4380,3637.48 4075,3332.48 4075,2840 4044,2809 3983,2809 3972,2820 3972,2970 3982,2980 ; R30.2 4767.52,1863.52 v1(4770,1866)
  Bottom Layer w10: v1(3853,2560) 4076,2560 v1(4770,1866)
NetDA10_2: DA10.2 VT2.3 | length 714.6
  Top Layer w10: VT2.3 2159,2775 2159,3029 v1(2191,3061) ; v1(2362,3061) 2362,2880 2372,2870 DA10.2
  Bottom Layer w10: v1(2191,3061) v1(2362,3061)
NetDA10_16: VT5.3
NetDA11_2: DA11.2 DD3.2 | length 2142.3
  Top Layer w10: DD3.2 4295,3080 4266,3051 4266,2312 4194,2240 4114,2240 4104,2230 4104,2106 4323,1887 4323,1442 4415,1350 DA11.2
NetDA11_3: DA11.3 R40.2 R41.1 | length 2362.2
  Top Layer w10: R40.2 3888.48,1447.48 ; v1(4233,1792) 3888.48,1447.48 ; DA11.3 4465,1220 4454,1209 4040,1209 3973,1276 3973,1400 3925.52,1447.48 3888.48,1447.48 ; v1(5152,1940) 5169.98,1957.98 R41.1
  Bottom Layer w10: v1(4233,1792) 5004,1792 v1(5152,1940)
NetDA11_6: DA11.6 R37.2 | length 3185.7
  Top Layer w10: v1(2914,3317) 2929.48,3332.48 R37.2 ; v1(4347,2897) 4380,2864 4380,1815 4400,1795 4450,1795 4465,1780 DA11.6
  Bottom Layer w10: v1(2914,3317) 3001,3230 4014,3230 v1(4347,2897)
NetDA11_7: DA11.7
NetDA11_16: DD2.1 DD3.1 | length 3735.6
  Top Layer w10: DD2.1 1837,3715 v1(2050,3928) ; DD3.1 4388,3130 v1(4416,3102)
  Bottom Layer w10: v1(2050,3928) 4487,3928 4535,3880 4535,3221 v1(4416,3102)
NetDA12_1: DA12.1 VT3.1 | length 1183.1
  Top Layer w10: DA12.1 3743,1980 v1(3743,2043) ; v1(4415,1655) 4415,1767.6 VT3.1
  Bottom Layer w10: v1(3743,2043) 3796,1990 3920,1990 3941,1969 3941,1714 4029.35,1625.65 4258.11,1625.65 4287.46,1655 v1(4415,1655)
NetDA12_7: DA12.7 VT6.1 | length 812.8
  Top Layer w10: VT6.1 3760,1377.6 3781.91,1399.51 3781.91,1504.14 3849,1571.23 3849,1858 3921,1930 DA12.7
NetDA13_2: DA13.2 R39.1 | length 2768
  Top Layer w10: R39.1 4100.52,1382.52 4218,1500 v1(4218,1675) ; DA13.2 5078,2640 v1(5149,2569)
  Bottom Layer w10: v1(4218,1675) 4031,1675 4006,1700 4006,1800 4046,1840 4304,1840 4332,1812 4796,1812 4963,1979 5139,1979 5295,2135 5295,2175 5149,2321 v1(5149,2569)
NetDA13_3: DA13.3 R40.1 | length 2695.2
  Top Layer w10: R40.1 3801.91,1382.52 3801.91,1484.14 4046.77,1729 v1(4046.77,1749) ; DA13.3 5080,2590 5104.49,2565.51 5104.49,2540 5289.49,2355 v1(5315,2355)
  Bottom Layer w10: v1(4046.77,1749) 5200,1749 5315,1864 v1(5315,2355)
NetDD1_4: DD1.4 DD1.12 DD2.3 | length 2219.8
  Top Layer w10: DD2.3 1832,3615 2217.59,4000.59 3125.37,4000.59 3400,3725.97 3400,3635 3420,3615 ; DD1.4 3332,3565 3382,3615 3420,3615 ; DD1.12 3420,3615
NetDD2_2: DD2.2 DD2.5 | length 214
  Top Layer w10: DD2.5 1780,3515 1766,3529 1766,3651 1780,3665 DD2.2
NetR28_2: R28.2 R29.2 R32.1 | length 3265.8
  Top Layer w10: R28.2 3717.5,3614 v1(3774,3614) ; v1(4476,3236) 4476,3001 4407,2932 4407,2241 4653,1995 R29.2 4760.04,1933.04 4730,1903 4730,1639 4832.48,1536.52 R32.1
  Bottom Layer w10: v1(3774,3614) 4066,3322 4066,3260 4090,3236 v1(4476,3236)
NetR31_2: R31.2 VT3.3 | length 496.1
  Top Layer w10: VT3.3 4665,1805 4710,1760 4710,1554.98 4740,1524.98 R31.2
NetR33_2: R33.2 VT6.2 | length 3385.9
  Top Layer w10: VT6.2 3624.4,1452.4 v1(3696,1524) ; v1(6232,2703) 6360,2703 6402.5,2660.5 R33.2
  Bottom Layer w10: v1(3696,1524) 5053,1524 v1(6232,2703)
NetVT1_1: VT1.1 VT1.3 VT2.1 VT3.2 | length 3655.1
  Top Layer w10: VT1.3 2005,2498.4 2042.4,2461 VT1.1@2042.4,2447 ; VT2.1 2245,2812.4 2245,2784 2286.12,2742.88 2286.12,2712.28 2318.39,2680 2318.39,2550.99 2359,2510.38 2359,2460 2346,2447 VT1.1@2042.4,2447 ; v1(2270,2357) 2085.4,2357 2042.4,2400 VT1.1 VT1.1@2042.4,2447 ; VT3.2 4495.4,1842.4 v1(4505,1852)
  Bottom Layer w10: v1(2270,2357) 2353,2274 3580,2274 3844,2010 4347,2010 v1(4505,1852)
NetVT4_1: VT4.1 VT4.3 VT5.1 VT6.3 | length 2461.5
  Top Layer w10: VT6.3 3720,1415 3742,1437 3742,1627 3823,1708 3823,2229 3745,2307 3745,2949 3778,2982 VT5.1@3778,3072.6 ; VT5.1 VT5.1@3778,3072.6 ; VT4.3 4005.4,3605 3968,3567.6 VT4.1 3920,3567.6 3874,3521.6 3874,3183 3784.94,3093.94 VT5.1@3778,3072.6
Vin: DA5.4 XS4.1 | length 3515.7
  Top Layer w10: v1(3603,2310) 3603,2340 3623,2360 DA5.4
  Bottom Layer w10: XS4.1 1175,3200 1175,2394 1200,2369 2150.93,2369 2210,2428.07 2379,2428.07 2497.07,2310 v1(3603,2310)
Vout: DA13.1 R39.2 R42.1 XS5.1 | length 6203.2
  Top Layer w10: R39.2 4031,1447.48 4031,1345 v1(4210,1345) ; DA13.1 5138,2690 5219,2609 5219,2511 v1(5341,2511) ; R42.1 R42.1@6193,2547.52 ; v1(6231,2471) 6193,2509 R42.1@6193,2547.52 ; v1(6231,2547.52) R42.1@6193,2547.52
  Bottom Layer w10: v1(4210,1345) 4282,1417 XS5.1@6779.85,1417 ; v1(5341,2511) 5492,2360 5568,2360 6024,2816 6195,2816 6272,2739 6272,2588.52 v1(6231,2547.52) ; v1(6231,2471) 6231,1965.85 XS5.1@6779.85,1417 ; XS5.1 XS5.1@6779.93,1416.92 ; XS5.1@6779.85,1417 XS5.1@6779.93,1416.92 ; XS5.1@6779.85,1417 6780,1417 XS5.1@6779.93,1416.92
pads on no net: C2.2 C3.2 C4.2 C7.1 C8.1 DA1.5 DA1.6 DA2.5 DA2.6 DA2.8 DA3.5 DA3.6 DA3.7 DA3.8 DA4.5 DA4.6 DA4.7 DA5.5 DA5.6 DA6.4 DA6.5 DA7.2 DA7.5 DA7.6 DA8.5 DA8.6 DA9.5 DA9.6 DA10.5 DA11.5 DA12.5 DA12.6 DA13.4 DA13.5 DA13.6 DA13.7 DD1.1 DD1.7 DD2.7 DD2.12 DD2.13 DD3.4 DD3.5 DD3.8 DD4.1 DD4.2 DD4.3 DD4.5 DD4.6 DD4.7 R7.2 R8.2 R11.1 R15.2 VD1.1 VD2.2

## Polygon pours and split planes (outlines as drawn)
A on Top Layer "A_L01_P000" (solid, pour order 0): 1005,4040 1005,1005 7000,1005 7000,4035 6995,4040
D on Bottom Layer "D_L02_P001" (solid, pour order 1): 1005,4040 1005,1005 7000,1005 7000,4035 6995,4040